# Altium PCB main.PcbDoc
Units mil, origin at the board's own origin, x right, y up, seen from the top; angles counter-clockwise.
Board outline 3100 x 2200 mil, 2 copper layers (Top Layer, Bottom Layer); 39 components, 24 nets, 112 pads, 13 vias.
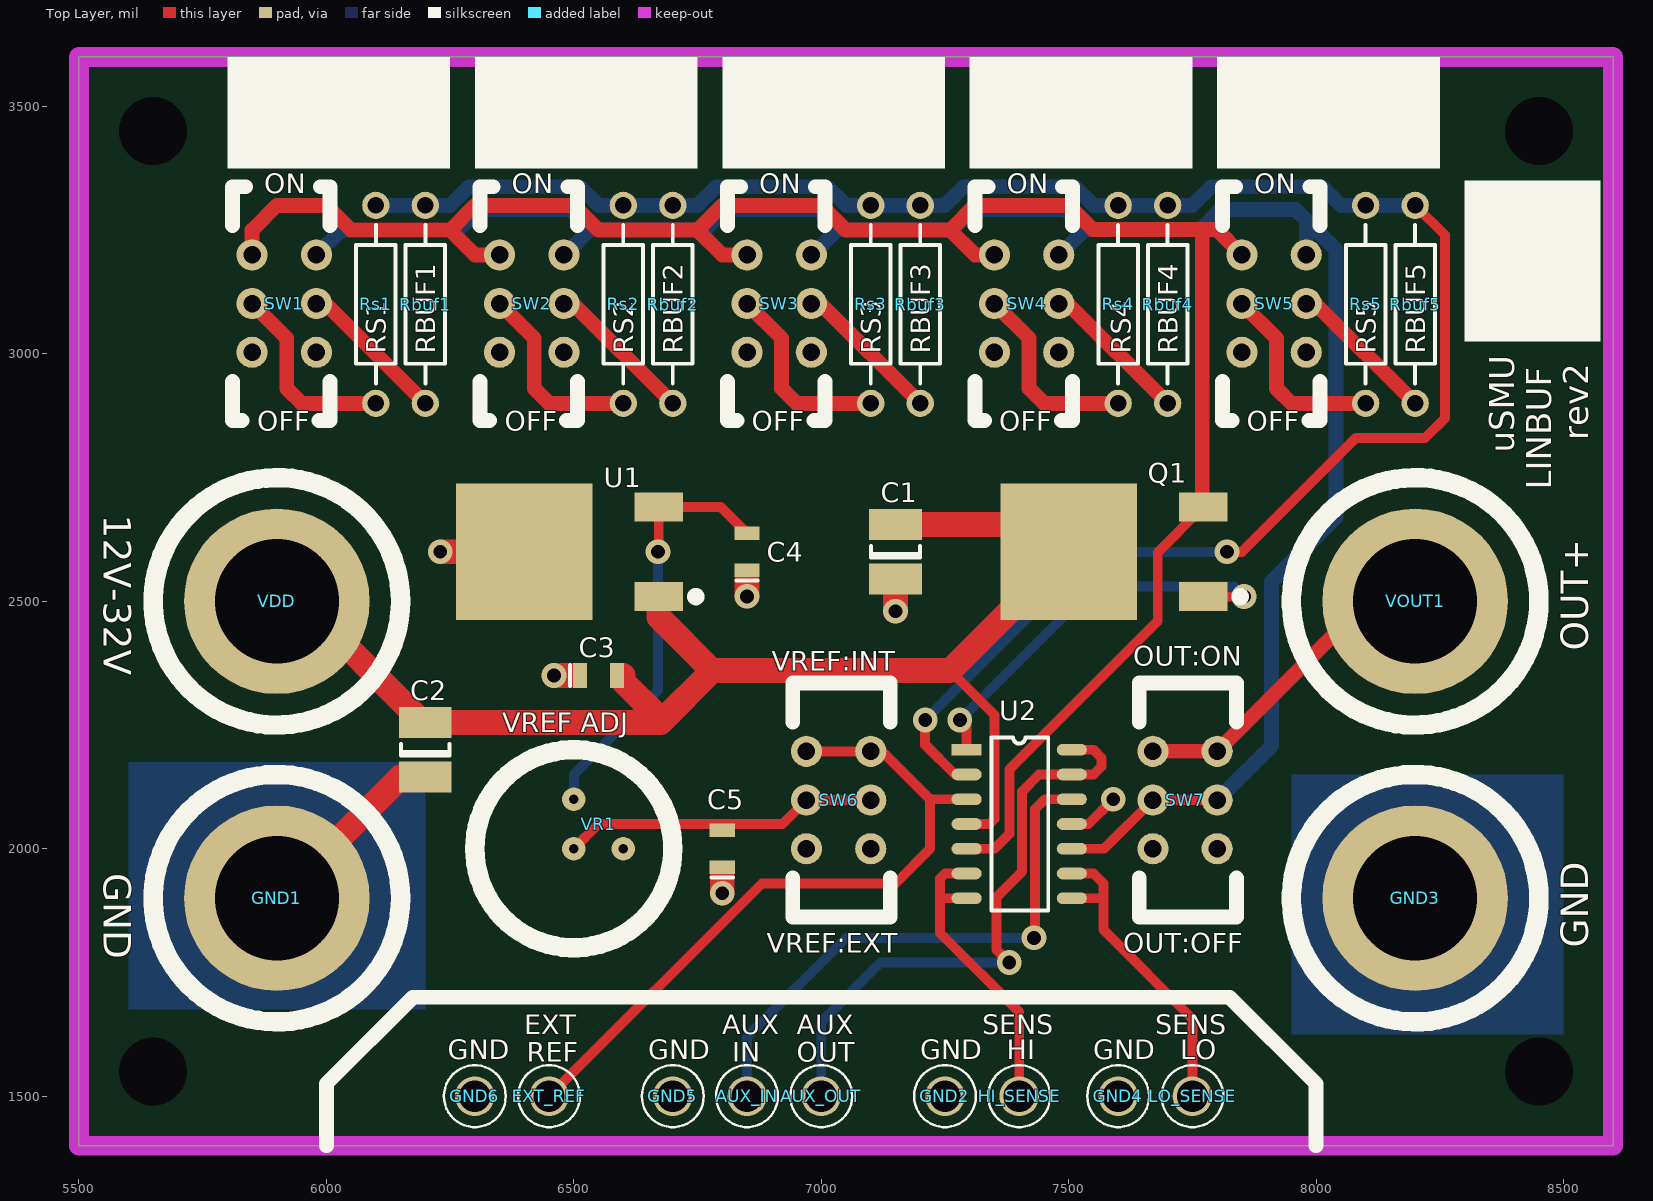
[diagram p0: Top Layer view]
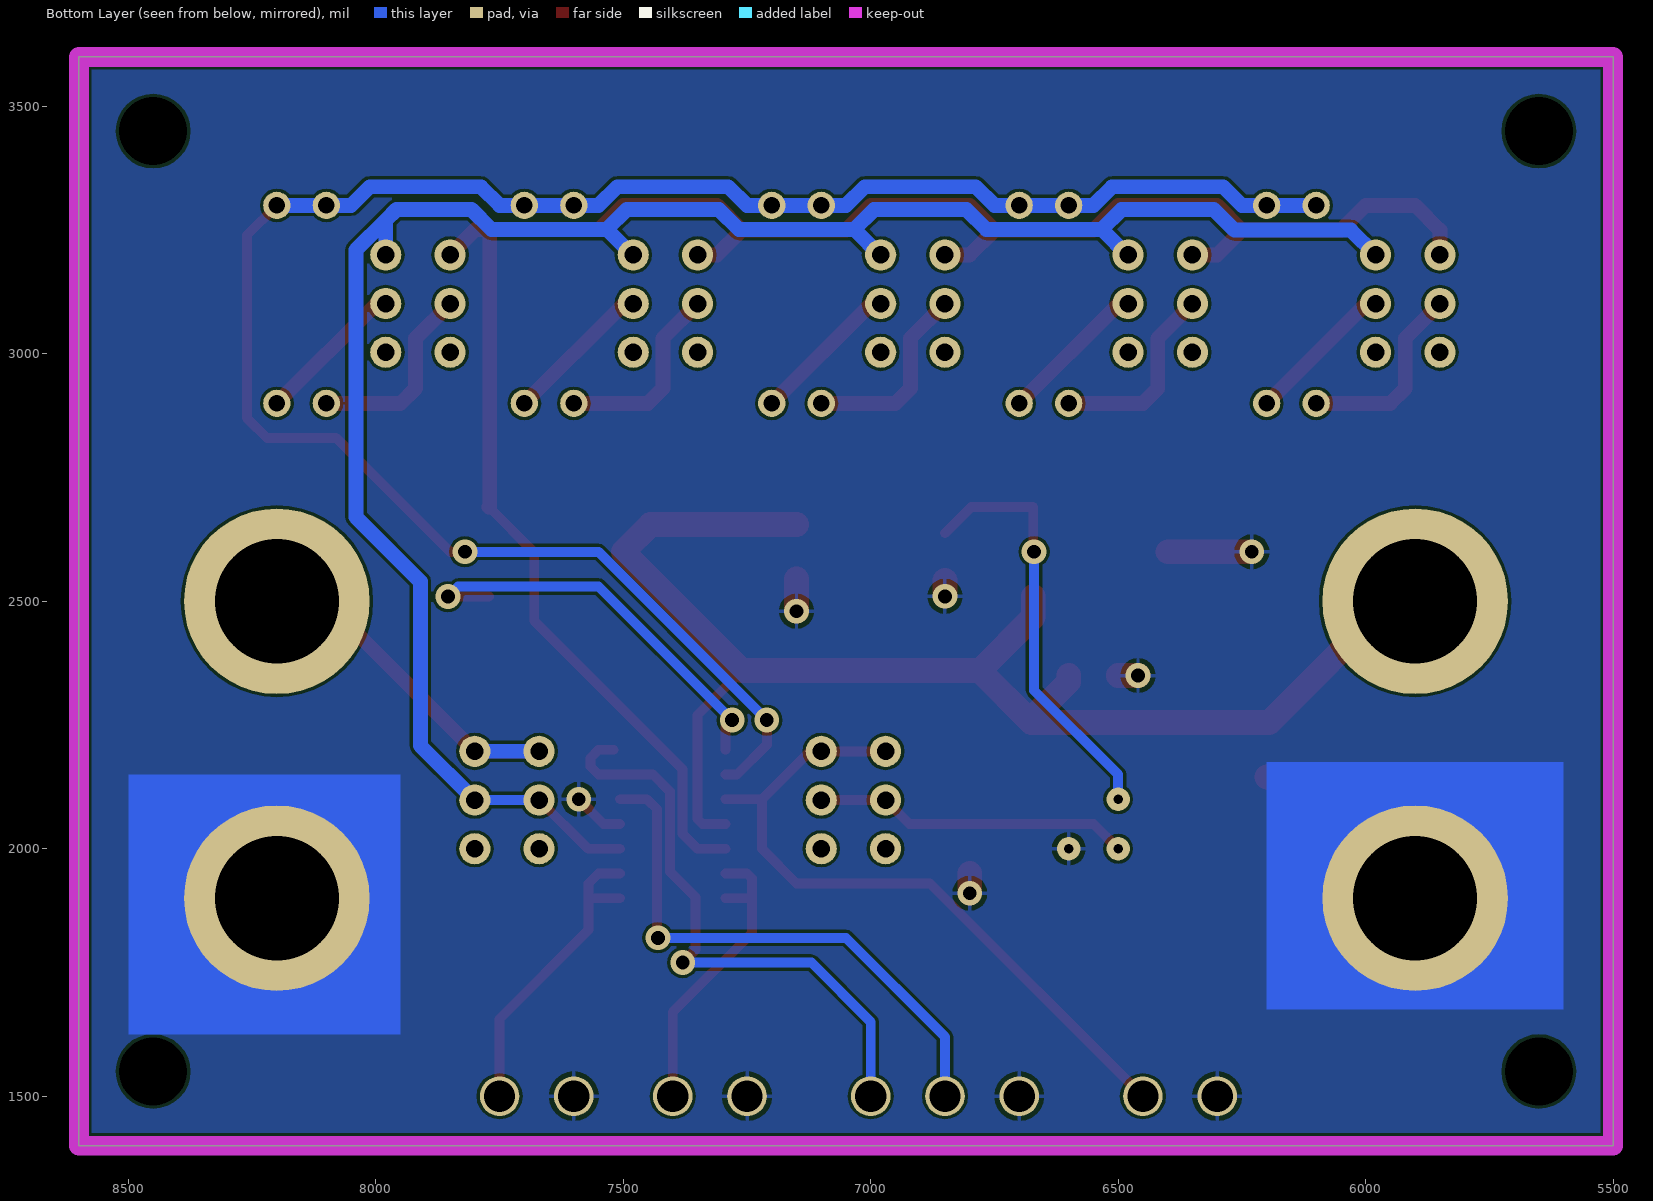
[diagram p1: Bottom Layer view, seen from below]

## Layer stack, top to bottom
Top Layer: signal copper 1.4
Dielectric: dielectric 12.6, FR-4, Dk 4.8
Bottom Layer: signal copper 1.4

## Board outline
5500,1400 5500,3600 8600,3600 8600,1400

## Design rules (kind name [scope] priority, off if disabled: settings)
Clearance "Clearance~Sunstone Circuits" [All] p1: gap=6 // Sunstone Circuits Minimum Clearance Rule (Double Sided)
HoleSize "HoleSize~Sunstone Circuits" [All] p1: absolutevalues=TRUE maxlimit=251 minlimit=16 maxpercent=80.000 minpercent=20.000 // SSC Hole Size Rule For Single Sided & Double Sided Designs.
HoleSize Testpoint [All] p2: absolutevalues=TRUE maxlimit=100 minlimit=1 maxpercent=80.000 minpercent=20.000
HoleSize TestPointUsage [All] p3: absolutevalues=TRUE maxlimit=100 minlimit=1 maxpercent=80.000 minpercent=20.000
MinimumAnnularRing "MinimumAnnularRing~Sunstone Circuits" [All] p1: minimumring=7 // Sunstone Circuits Minimum Annular Ring (Double Sided)
PlaneClearance "PlaneClearance~Sunstone Circuits" [All] p1: clearance=12 // Sunstone Circuits Power Plane Clearance Rule (Double Sided)
PlaneConnect "PlaneConnect~Sunstone Circuits" [All] p1: planeconnectstyle=Relief reliefexpansion=10 reliefentries=4 reliefconductorwidth=8 reliefairgap=10 // Sunstone Circuits Power Plane Connect Rule (Double Sided)
PolygonConnect "PolygonConnect~Sunstone Circuits" [All] p1: connectstyle=Relief reliefconductorwidth=8 reliefentries=4 polygonreliefangle="90 Angle" airgapwidth=10 // Sunstone Circuits Polygon Connect Style (Double Sided)
RoutingVias "RoutingVias~Sunstone Circuits" [All] p1: holewidth=16 width=30 viastyle="Through Hole" minholewidth=16 minwidth=30 maxholewidth=20 maxwidth=40 // Sunstone Circuits Routing Vias Rule (Double Sided)
ShortCircuit "ShortCircuit~Sunstone Circuits" [All] p1: allowed=FALSE // Sunstone Circuits Short Circuit Rule~Do Not Allow (Double Sided)
SolderMaskExpansion "SolderMaskExpansion~Sunstone Circuits" [All] p1: expansion=3 // Sunstone Circuits Solder Mask Expansion Rule (Double Sided)
ViasUnderSMD "ViasUnderSMD~Sunstone Circuits" [All] p1: allowed=FALSE // Sunstone Circuits Vias Under SMD~Do Not Allow (Double Sided)
Width "Width~Sunstone Circuits" [All] p1: maxlimit=100 minlimit=6 preferedwidth=10 // Sunstone Circuits Minimum Width Rule (Double Sided)
24 further rules are at their usual default settings.

## Components (designator, comment, footprint, x,y, rotation, side; value= is the part's Value field where it differs from the comment)
AUX_IN "Test Point" "Test Point - Large" 6850,1500 r90 top
AUX_OUT "Test Point" "Test Point - Large" 7000,1500 r90 top
C1 "Cap" 1210-W 7150,2600 r90 top
C2 "Cap" 1210-W 6200,2200 r90 top
C3 "Cap" 0805 6550,2350 r0 top
C4 "Cap" 0805 6850,2600 r90 top
C5 "Cap" 0805 6800,2000 r90 top
EXT_REF "Test Point" "Test Point - Large" 6450,1500 r90 top
GND1 "BANANA" BANANA 5900,1900 r0 top
GND2 "Test Point" "Test Point - Large" 7250,1500 r90 top
GND3 "BANANA" BANANA 8200,1900 r0 top
GND4 "Test Point" "Test Point - Large" 7600,1500 r90 top
GND5 "Test Point" "Test Point - Large" 6700,1500 r90 top
GND6 "Test Point" "Test Point - Large" 6300,1500 r90 top
HI_SENSE "Test Point" "Test Point - Large" 7400,1500 r90 top
LO_SENSE "Test Point" "Test Point - Large" 7750,1500 r90 top
Q1 "2STD16654T4" TO-252 7500,2600 r90 top
Rbuf1 "Res2" AXIAL-0.4 6200,3100 r90 top
Rbuf2 "Res2" AXIAL-0.4 6700,3100 r90 top
Rbuf3 "Res2" AXIAL-0.4 7200,3100 r90 top
Rbuf4 "Res2" AXIAL-0.4 7700,3100 r90 top
Rbuf5 "Res2" AXIAL-0.4 8200,3100 r90 top
Rs1 "Res2" AXIAL-0.4 6100,3100 r90 top
Rs2 "Res2" AXIAL-0.4 6600,3100 r90 top
Rs3 "Res2" AXIAL-0.4 7100,3100 r90 top
Rs4 "Res2" AXIAL-0.4 7600,3100 r90 top
Rs5 "Res2" AXIAL-0.4 8100,3100 r90 top
SW1 "JS202011CQN" JS202011CQN_LABEL 5850,3200 r0 top
SW2 "JS202011CQN" JS202011CQN_LABEL 6350,3200 r0 top
SW3 "JS202011CQN" JS202011CQN_LABEL 6850,3200 r0 top
SW4 "JS202011CQN" JS202011CQN_LABEL 7350,3200 r0 top
SW5 "JS202011CQN" JS202011CQN_LABEL 7850,3200 r0 top
SW6 "JS202011CQN" JS202011CQN 7100,2000 r180 top
SW7 "JS202011CQN" JS202011CQN 7800,2000 r180 top
U1 "MC78M06" TO-252 6400,2600 r90 top
U2 "OPA1492" 14-SOIC-TI 7400,2050 r0 top
VDD "BANANA" BANANA 5900,2500 r0 top
VOUT1 "BANANA" BANANA 8200,2500 r0 top
VR1 "3339H" 3339H 6500,2000 r0 top

## Footprints (in the part's own frame and the unit in brackets; to place one, negate y for a bottom-side part, rotate by r counter-clockwise, add the part's x,y. Pads: shape width x height; smd on the part's side, far side on the other; paste and mask are expansions set on the pad)
14-SOIC-TI [mm]
  rect 1.55x0.6 smd: 1(-2.7,3.81)
  oval 1.55x0.6 smd: 2(-2.7,2.54) 3(-2.7,1.27) 4(-2.7,0) 5(-2.7,-1.27) 6(-2.7,-2.54) 7(-2.7,-3.81) 8(2.7,-3.81) 9(2.7,-2.54) 10(2.7,-1.27) 11(2.7,0) 12(2.7,1.27) 13(2.7,2.54) 14(2.7,3.81)
  silkscreen extent -1.43,-4.44 1.49,4.44
0805 [mm] "Surface Mount; Body 2.0 x 1.25 mm (LxW typ)"
  rect 0.7x1.3 smd: 1(-0.95,0) 2(0.95,0)
  silkscreen extent -1.48,-0.55 -1.48,0.55, body extent -1,-0.63 1,0.63, height 1.25
1210-W [mm] "Chip Capacitor; Body 3.2 x 2.5 mm (LxW typ)"
  rect 1.6x2.7 smd: 1(-1.4,0) 2(1.4,0)
  silkscreen extent -0.3,-1.25 0.3,1.25, body extent -1.6,-1.25 1.6,1.25, height 2.5
3339H [mm] "Bourns 4-turn Trimpot"
  round 1.2 hole 0.5: 1(0,2.54) 2(0,0) 3(2.54,0)
  silkscreen extent -5.08,-5.08 5.08,5.08
AXIAL-0.4 [mm] "Axial Device, Thru-Hole; 2 Leads; 0.4 in Pin Spacing"
  round 1.4 hole 0.85: 1(-5.08,0) 2(5.08,0)
  silkscreen extent -4.06,-1.02 4.06,1.02
BANANA [mil]
  round 375 hole 251: 0(0,0)
  silkscreen extent -250,-250 250,250
JS202011CQN [mm] "DPDT SWITCH"
  round 1.6 hole 0.9: 1(0,0) 2(0,-2.5) 3(0,-5) 4(3.3,-5) 5(3.3,-2.5) 6(3.3,0)
  silkscreen extent -1,-8.5 4,3.5
JS202011CQN_LABEL [mm] "DPDT SWITCH"
  round 1.6 hole 0.9: 1(0,0) 2(0,-2.5) 3(0,-5) 4(3.3,-5) 5(3.3,-2.5) 6(3.3,0)
  silkscreen extent -1,-8.5 4,3.5
"Test Point - Large" [mil] "Test Point, 63mil hole, example DK: 5012K-ND"
  round 80 hole 63: 0(0,0)
  silkscreen extent -62,-62 62,62
TO-252 [mm]
  rect 1.5x2.5 smd: 1(-2.3,-6.9) 3(2.3,-6.9)
  rect 7x7 smd: TAB(0,0)
  silkscreen extent -2.5,-9 -2.1,-8.6

## Part data
AUX_IN AUX_OUT EXT_REF GND2 GND4 GND5 GND6 HI_SENSE LO_SENSE: "Test Point, large or small foot prints"
C1 C2 C3 C4 C5: "Ceramic Capacitor (Surface Mount)"
GND1 GND3 VDD VOUT1: "Banana plug"
Q1: "STMicroelectronics NPN BJT High Power"
Rbuf1 Rbuf2 Rbuf3 Rbuf4 Rbuf5 Rs1 Rs2 Rs3 Rs4 Rs5: "Resistor"
SW1 SW2 SW3 SW4 SW5 SW6 SW7: "6-pin DPDT (tied) Slide Switch"
U1: library part MC78M00, "500mA Positive Voltage Regulator"
U2: "OPAx192 Op-Amp Texas Instruments"
VR1: "Bourns 4-turn Trimpot"

## Free pads (board coordinates)
  round 0 hole 137.8 unplated: ""(5650,1550) ""(5650,3450) ""(8450,1550) ""(8450,3450)

## Via types
v1: diameter 50, hole 28, Top Layer to Bottom Layer, 13 vias

## Nets (pads, with @x,y where several pads share a name; then routed paths per layer and width w, separated by ;. In a path a pad name is that pad's centre, name@x,y a point inside that pad or via, vN(x,y) a via of type N, cw(c..) or ccw(c..) an arc to the next point about the centre after c; other vN are vias at no path point)
AUX_OUT: AUX_OUT.0 U2.13 U2.14 | length 1209.6
  Top Layer w20: v1(7380,1770) 7354,1796 7354,1902.06 7406,1954.06 7406,2116 7440,2150 7550,2150 7566.3,2166.3 7566.3,2183.7 7550,2200 U2.14@7520,2200
  Bottom Layer w20: AUX_OUT.0 7000,1650 7120,1770 v1(7380,1770)
FEEDBACK: Rbuf1.2 Rbuf2.2 Rbuf3.2 Rbuf4.2 Rbuf5.2 Rs1.2 Rs2.2 Rs3.2 Rs4.2 Rs5.2 U2.2 | length 4141.3
  Top Layer w20: v1(7210,2260) 7210,2210 7270,2150 U2.2 ; v1(7820,2600) 7850,2600 8080,2830 8220,2830 8260,2870 8260,3240 Rbuf5.2
  Bottom Layer w20: v1(7210,2260) 7550,2600 v1(7820,2600)
  Bottom Layer w30: Rs1.2 Rbuf1.2 6250,3300 6287.8,3337.8 6512.2,3337.8 6550,3300 Rs2.2 Rbuf2.2 6750,3300 6787.8,3337.8 7012.2,3337.8 7050,3300 Rs3.2 Rbuf3.2 7250,3300 7287.8,3337.8 7512.2,3337.8 7550,3300 Rs4.2 Rbuf4.2 7750,3300 7787.8,3337.8 8012.2,3337.8 8050,3300 Rs5.2 Rbuf5.2
GND: C1.1 C2.1 C3.1 C4.1 C5.1 GND1.0 GND2.0 GND3.0 GND4.0 GND5.0 GND6.0 U1.TAB U2.11 VR1.3 | length 852.7
  Top Layer w20: U2.11 7540,2050 v1(7590,2100)
  Top Layer w50: GND1.0 5905.12,1900 6150,2144.88 C2.1 ; v1(6230,2600) U1.TAB ; v1(6460,2350) C3.1@6500,2350 ; v1(6800,1910) C5.1@6800,1950 ; v1(6850,2510) 6850,2541.93 ; v1(7150,2480) C1.1
HI_SENSE: HI_SENSE.0 U2.6 U2.7 | length 617.8
  Top Layer w20: U2.7 7240,1900 ; U2.6 7250,1950 7240,1940 7240,1900 ; HI_SENSE.0 7400,1670 7240,1830 7240,1900
HIGH: Q1.3 SW1.1 SW2.1 SW3.1 SW4.1 SW5.1 U2.5 | length 4071
  Top Layer w20: U2.5 7350,2000 7380,2030 7380,2160 7680,2460 7680,2598.9 Q1.3
  Top Layer w30: SW1.1 5850,3250 5900,3300 6000,3300 6050,3250 6250,3250 ; SW2.1 6300,3200 6250,3250 ; SW3.1 6800,3200 6750,3250 ; SW4.1 7310.63,3200 7260.63,3250 ; Q1.3 7770,2692.2 7770,3251.44 ; SW5.1 7798.56,3251.44 7770,3251.44 ; 6250,3250 6300,3300 6500,3300 6550,3250 6750,3250 ; 6750,3250 6800,3300 7000,3300 7050,3250 7260.63,3250 ; 7260.63,3250 7310.63,3300 7500,3300 7548.56,3251.44 7770,3251.44
LO_SENSE: LO_SENSE.0 U2.8 U2.9 | length 640.2
  Top Layer w20: U2.8 7570,1900 ; U2.9 7550,1950 7570,1930 7570,1900 ; LO_SENSE.0 7750,1656.3 7570,1836.3 7570,1900
NetAUX_IN_0: AUX_IN.0 U2.12 | length 1130.4
  Top Layer w20: v1@7420,1820 7432,1832 7432,2080 7452,2100 U2.12
  Bottom Layer w20: AUX_IN.0 6850,1620 7050,1820 v1(7430,1820)
NetC4_2: C4.2 U1.3 VR1.1 | length 862
  Top Layer w20: v1(6670,2600) 6671.65,2601.65 U1.3 6796.85,2690.55 C4.2
  Bottom Layer w20: VR1.1 6500,2150 6670,2320 v1(6670,2600)
NetC5_2: C5.2 SW6.2 SW6.5 VR1.2 | length 640.8
  Top Layer w20: VR1.2 6550,2050 6921.65,2050 SW6.5 SW6.2
NetEXT_REF_0: EXT_REF.0 SW6.3 SW6.4 U2.3 | length 1440.8
  Top Layer w20: EXT_REF.0 6880,1930 7150,1930 7220,2000 7220,2100 ; SW6.4 SW6.3 7123.15,2196.85 7220,2100 ; U2.3 7220,2100
NetQ1_1: Q1.1 U2.1 | length 843
  Top Layer w20: v1(7280,2260) 7293.7,2246.3 U2.1 ; Q1.1 v1(7854.33,2509.45)
  Bottom Layer w20: v1(7280,2260) 7550,2530 7833.78,2530 v1(7854.33,2509.45)
NetRbuf1_1: Rbuf1.1 SW1.5 | length 285.1
  Top Layer w30: SW1.5@5998.43,3101.57 Rbuf1.1
NetRbuf2_1: Rbuf2.1 SW2.5 | length 285.1
  Top Layer w30: SW2.5@6498.43,3101.57 Rbuf2.1
NetRbuf3_1: Rbuf3.1 SW3.5 | length 303.6
  Top Layer w30: SW3.5 6998.43,3101.57 Rbuf3.1
NetRbuf4_1: Rbuf4.1 SW4.5 | length 285.1
  Top Layer w30: SW4.5@7498.43,3101.57 Rbuf4.1
NetRbuf5_1: Rbuf5.1 SW5.5 | length 285.1
  Top Layer w30: SW5.5@7998.43,3101.57 Rbuf5.1
NetRs1_1: Rs1.1 SW1.2 | length 393
  Top Layer w30: SW1.2 5920,3031.57 5920,2930 5950,2900 Rs1.1
NetRs2_1: Rs2.1 SW2.2 | length 393
  Top Layer w30: SW2.2 6420,3031.57 6420,2930 6450,2900 Rs2.1
NetRs3_1: Rs3.1 SW3.2 | length 393
  Top Layer w30: SW3.2 6920,3031.57 6920,2930 6950,2900 Rs3.1
NetRs4_1: Rs4.1 SW4.2 | length 393
  Top Layer w30: SW4.2 7420,3031.57 7420,2930 7450,2900 Rs4.1
NetRs5_1: Rs5.1 SW5.2 | length 393
  Top Layer w30: SW5.2 7920,3031.57 7920,2930 7950,2900 Rs5.1
OUT: SW7.3 SW7.4 VOUT1.0 | length 785.4
  Top Layer w30: SW7.4 SW7.3 8103.15,2500 VOUT1.0
  Bottom Layer w30: SW7.4 SW7.3
RSLO: SW1.6 SW2.6 SW3.6 SW4.6 SW5.6 SW7.2 SW7.5 U2.10 | length 4208.5
  Top Layer w20: U2.10 7571.65,2000 SW7.5 SW7.2
  Bottom Layer w20: SW7.5 SW7.2
  Bottom Layer w30: SW1.6 6029.92,3250 6265.05,3250 6306.85,3291.8 6493.15,3291.8 6533.51,3251.44 ; SW2.6 6479.92,3197.86 6533.51,3251.44 ; SW3.6 6979.92,3197.86 7033.51,3251.44 ; SW4.6 7482.06,3200 7533.51,3251.44 ; SW7.2 7910,2208.43 7910,2540 8040,2670 8040,3210 7979.92,3270.08 ; SW5.6 7979.92,3270.08 ; 6533.51,3251.44 6766.49,3251.44 6806.85,3291.8 6993.15,3291.8 7033.51,3251.44 ; 7033.51,3251.44 7266.49,3251.44 7306.85,3291.8 7493.15,3291.8 7533.51,3251.44 ; 7533.51,3251.44 7766.49,3251.44 7806.85,3291.8 7958.2,3291.8 7979.92,3270.08
VSUPPLY: C1.2 C2.2 C3.2 Q1.TAB U1.1 U2.4 VDD.0 | length 2935.2
  Top Layer w20: 7260,2360 7350,2270 7350,2060 7340,2050 U2.4
  Top Layer w50: VDD.0 5950,2500 6194.88,2255.12 6675.12,2255.12 ; C3.2@6600,2350 6600,2337.4 6675.12,2262.28 6675.12,2255.12 ; U1.1 6671.65,2468.35 6780,2360 ; C1.2 7444.88,2655.12 Q1.TAB 7260,2360 6780,2360 ; 6675.12,2255.12 6780,2360
pads on no net: SW1.3 SW1.4 SW2.3 SW2.4 SW3.3 SW3.4 SW4.3 SW4.4 SW5.3 SW5.4 SW6.1 SW6.6 SW7.1 SW7.6

## Polygon pours and split planes (outlines as drawn)
GND on Bottom Layer "Bottom Layer-No Net" (solid, pour order 3): 5500,3600 5500,1400 8600,1400 8600,3600

## Keep-outs
Keep-Out Layer:
  the board outline again, w40

## Other copper
Bottom Layer:
  rectangle net GND: 7950,1625 8500,2150
  rectangle net GND: 5600,1675 6200,2175

## Silkscreen, mask and mechanical layers (free items; w line width, h text height)
Top Overlay:
  rectangle: 8300,3025 8575,3350
  rectangle: 6800,3375 7250,3600
  rectangle: 7800,3375 8250,3600
  rectangle: 7300,3375 7750,3600
  rectangle: 6300,3375 6750,3600
  rectangle: 5800,3375 6250,3600
  lines w30: 6000,1400 6000,1525 6175,1700 7825,1700 8000,1525 8000,1400
  text "RS1" at 6120,3000 h40 r90
  text "RBUF1" at 6220,3000 h40 r90
  text "RS2" at 6620,3000 h40 r90
  text "RBUF2" at 6720,3000 h40 r90
  text "RS3" at 7120,3000 h40 r90
  text "RBUF3" at 7220,3000 h40 r90
  text "RS4" at 7625,3000 h40 r90
  text "RBUF4" at 7720,3000 h40 r90
  text "RS5" at 8120,3000 h40 r90
  text "RBUF5" at 8220,3000 h40 r90
  text "rev2" at 8550,2825 h50 r90
  text "uSMU" at 8400,2800 h50 r90
  text "LINBUF" at 8475,2725 h50 r90
  text "12V-32V" at 5550,2675 h55 r270
  text "OUT+" at 8550,2400 h55 r90
  text "OUT:ON" at 7630,2370 h40
  text "VREF:INT" at 6900,2360 h40
  text "VREF ADJ" at 6355,2235 h40
  text "GND" at 5550,1950 h55 r270
  text "GND" at 8550,1800 h55 r90
  text "VREF:EXT" at 6890,1790 h40
  text "OUT:OFF" at 7610,1790 h40
  text "EXT" at 6400,1625 h40
  text "AUX" at 6800,1625 h40
  text "AUX" at 6950,1625 h40
  text "SENS" at 7325,1625 h40
  text "SENS" at 7675,1625 h40
  text "GND" at 6245,1575 h40
  text "GND" at 6650,1575 h40
  text "GND" at 7200,1575 h40
  text "HI" at 7375,1575 h40
  text "GND" at 7550,1575 h40
  text "LO" at 7725,1575 h40
  text "REF" at 6405,1570 h40
  text "IN" at 6820,1570 h40
  text "OUT" at 6950,1570 h40

## Text inside footprints (layer, text, board x,y; h text height)
SW1: Top Overlay "ON" at 5875,3325 h40; Top Overlay "OFF" at 5860,2845 h40
SW2: Top Overlay "ON" at 6375,3325 h40; Top Overlay "OFF" at 6360,2845 h40
SW3: Top Overlay "ON" at 6875,3325 h40; Top Overlay "OFF" at 6860,2845 h40
SW4: Top Overlay "ON" at 7375,3325 h40; Top Overlay "OFF" at 7360,2845 h40
SW5: Top Overlay "ON" at 7875,3325 h40; Top Overlay "OFF" at 7860,2845 h40